# Altium PCB FPSController.PcbDoc
Units mm, origin at the board's own origin, x right, y up, seen from the top; angles counter-clockwise.
Board outline 26 x 13 mm, 4 copper layers (Top Layer, Ground Layer, Power Layer, Bottom Layer), stack 0.778 mm thick; 23 components, 19 nets, 107 pads, 72 vias.
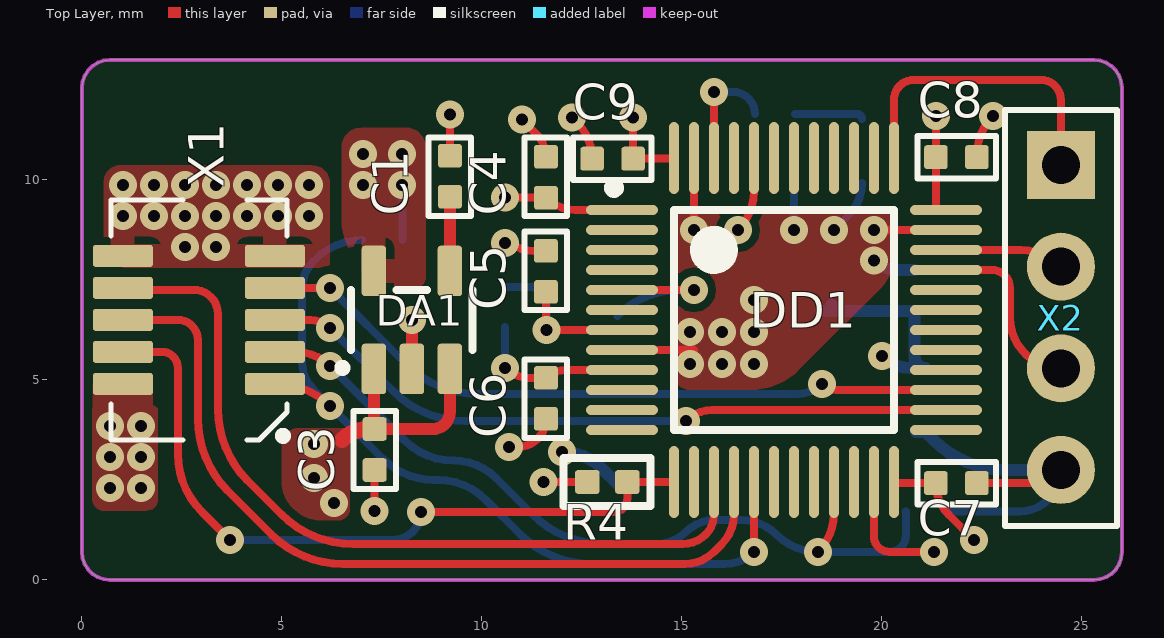
[diagram p0: Top Layer view]
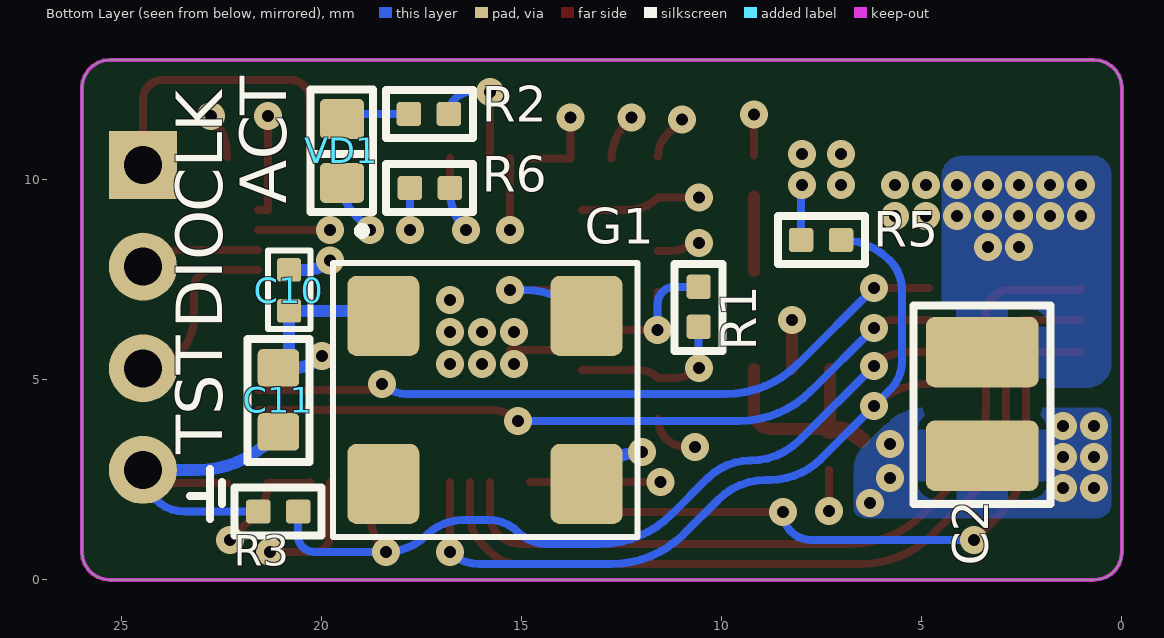
[diagram p1: Bottom Layer view, seen from below]
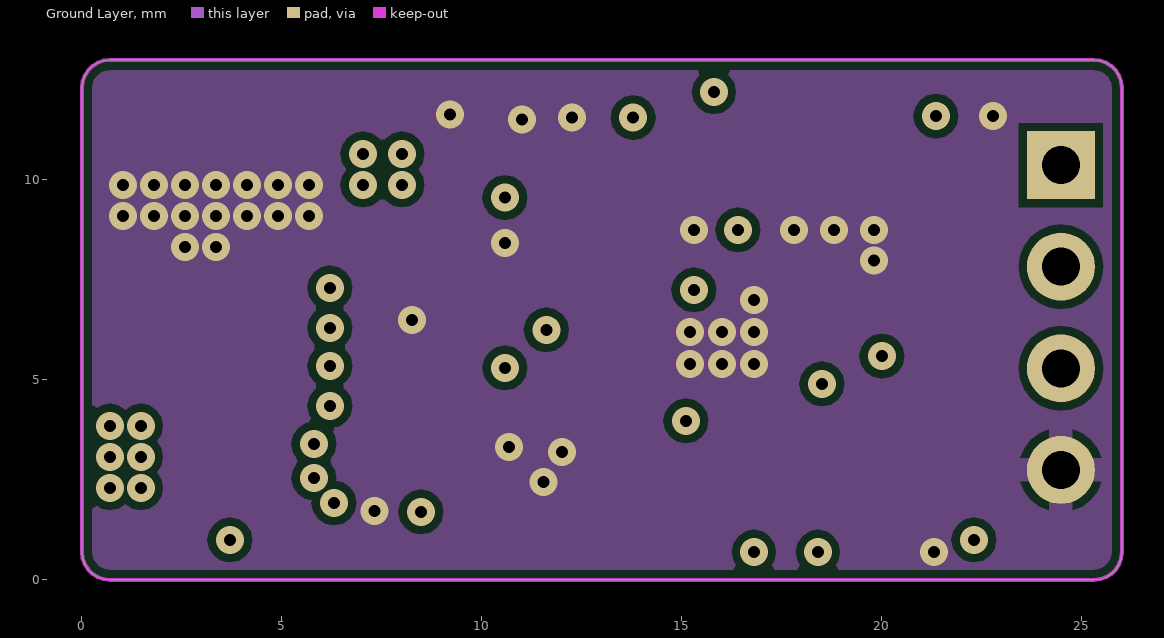
[diagram p2: Ground Layer]
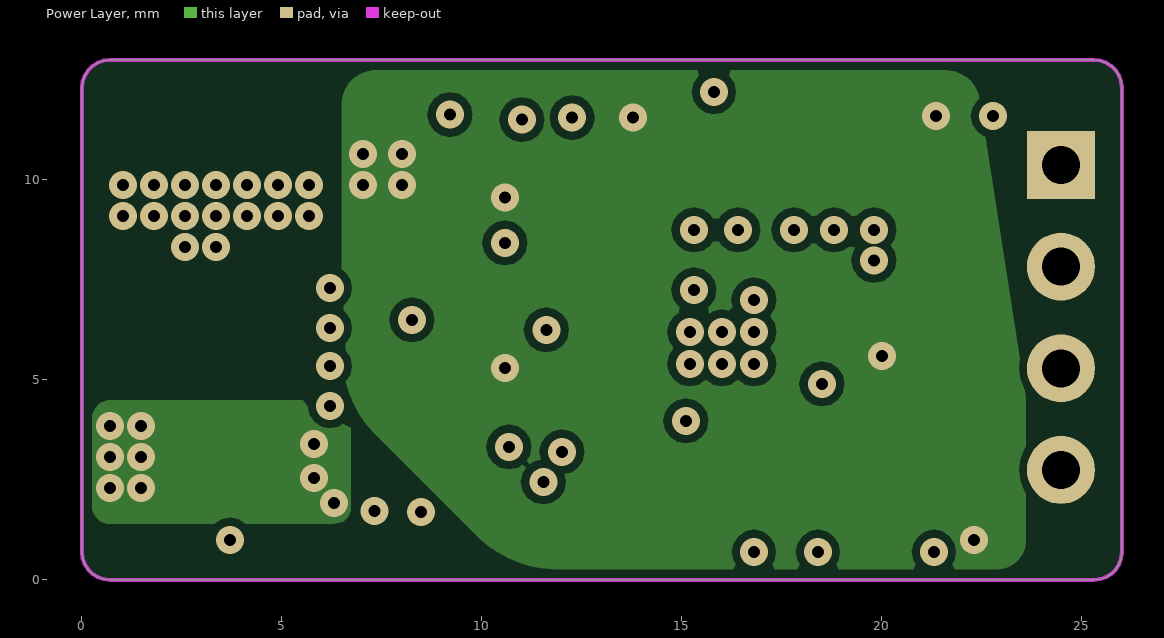
[diagram p3: Power Layer]
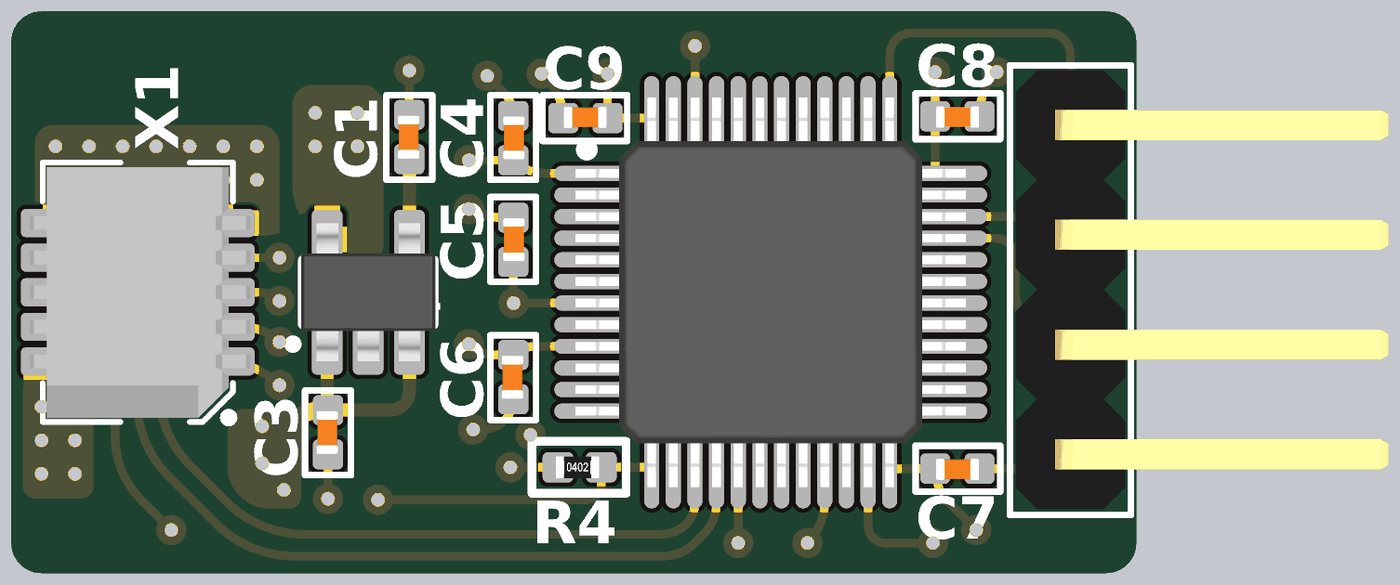
[diagram p4: 3D render of the assembled board from above, using the file's embedded part models]
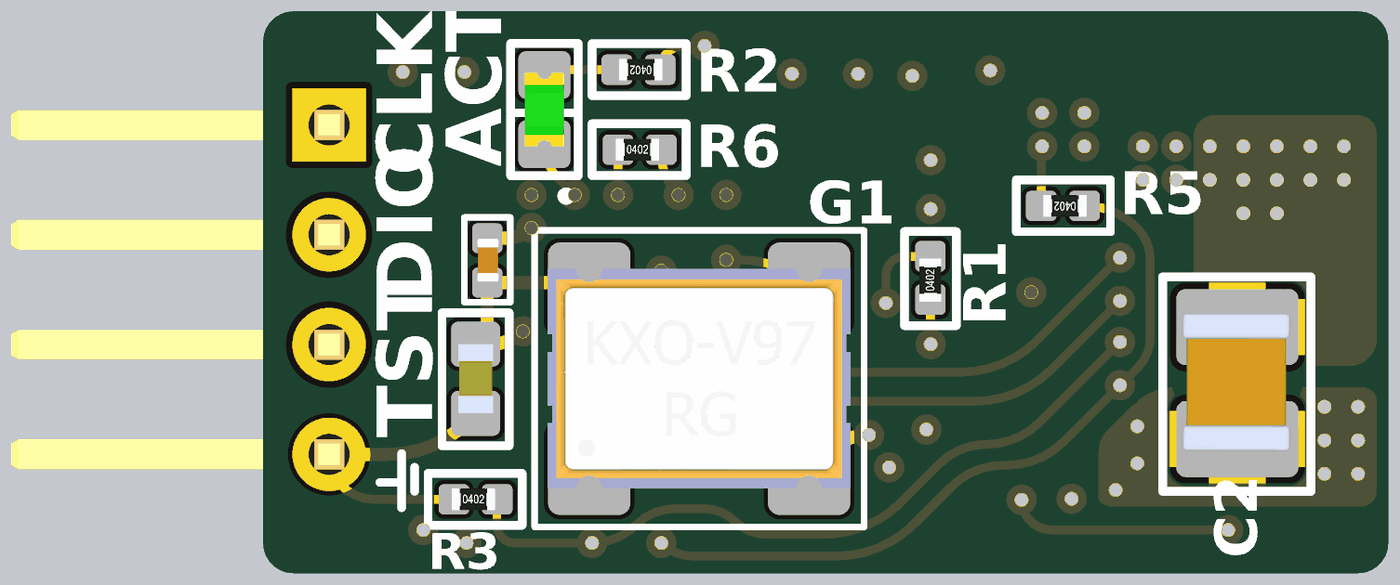
[diagram p5: 3D render of the assembled board from below, using the file's embedded part models]

## Layer stack, top to bottom
Top Solder: solder mask 0.0102, Solder Resist, Dk 3.5
Top Layer: signal copper 0.0356
Dielectric 1: core 0.254, FR-4, Dk 4.2
Ground Layer: signal copper 0.036
Dielectric 3: prepreg 0.127, Dk 4.2
Power Layer: signal copper 0.036
Dielectric 2: core 0.254, Dk 4.2
Bottom Layer: signal copper 0.0356
Bottom Solder: solder mask 0.0102, Solder Resist, Dk 3.5

## Board outline
0.7,13 0.544,12.982 0.396,12.931 0.264,12.847 0.153,12.736 0.069,12.604 0.018,12.456 0,12.3 0,0.7 0.018,0.544 0.069,0.396 0.153,0.263 0.264,0.153 0.396,0.069 0.544,0.017 0.7,0 25.3,0 25.456,0.017 25.604,0.069 25.736,0.153 25.847,0.263 25.931,0.396 25.982,0.544 26,0.7 26,12.3 25.982,12.456 25.931,12.604 25.847,12.736 25.736,12.847 25.604,12.931 25.456,12.982 25.3,13

## Design rules (kind name [scope] priority, off if disabled: settings)
Clearance Clearance_GND [InNet('5B') vs InNet('GND')] p1: gap=0.4 ignorepadtopadclearanceinfootprint=FALSE
Clearance Clearance_AGND_D [InNet('5BA_D') vs InNet('AGND_D')] p2: gap=0.4 ignorepadtopadclearanceinfootprint=FALSE
Clearance Clearance_AGND_M [InNet('5BA_M') vs InNet('AGND_M')] p3: gap=0.3 ignorepadtopadclearanceinfootprint=FALSE
Clearance Clearance_AGND_S [InNet('5BA_S') vs InNet('AGND_S')] p4: gap=0.3 ignorepadtopadclearanceinfootprint=FALSE
Clearance [All] p5: gap=0.2 ignorepadtopadclearanceinfootprint=FALSE
HoleSize [All] p1: absolutevalues=TRUE maxlimit=20 minlimit=0.025 maxpercent=80.000 minpercent=20.000
MinimumSolderMaskSliver [All] p1: minsoldermaskwidth=0.02
PasteMaskExpansion [All] p1: expansion=0.05
PolygonConnect PolygonConnect_via [All vs IsVia] p1: connectstyle=Direct reliefconductorwidth=0.254 reliefentries=4 polygonreliefangle="90 Angle" airgapwidth=0.254
PolygonConnect PolygonConnect_5B_1210 [HasFootprint('C1210')] p2: connectstyle=Relief reliefconductorwidth=1.3 reliefentries=4 polygonreliefangle="90 Angle" airgapwidth=0.2
PolygonConnect PolygonConnect_3.3B [HasFootprint('SlimStack-10pin-angl-plg') vs InNet('+3,3B')] p3: connectstyle=Relief reliefconductorwidth=1.5 reliefentries=4 polygonreliefangle="90 Angle" airgapwidth=0.254
PolygonConnect PolygonConnect_5B [HasFootprint('SlimStack-10pin-angl-plg') vs InNet('+5B')] p4: connectstyle=Relief reliefconductorwidth=1.5 reliefentries=4 polygonreliefangle="90 Angle" airgapwidth=0.254
PolygonConnect [All] p5: connectstyle=Relief reliefconductorwidth=0.6 reliefentries=4 polygonreliefangle="90 Angle" airgapwidth=0.2
RoutingVias [All] p1: holewidth=0.711 width=1.27 viastyle="Through Hole" minholewidth=0.711 minwidth=1.27 maxholewidth=0.711 maxwidth=1.27
SilkToSilkClearance [All] p1: silktosilkclearance=0
SilkToSolderMaskClearance [IsPad] p1: minsilkscreentomaskgap=0 clearancetoexposedcopper=TRUE
SolderMaskExpansion [All] p1: expansion=0.15 istentingtop=FALSE
Width [All] p1: maxlimit=3 minlimit=0.15 preferedwidth=0.2
25 further rules are at their usual default settings.

## Components (designator, comment, footprint, x,y, rotation, side; value= is the part's Value field where it differs from the comment)
C1 "0,1мк" C0402 9.18,10.08 r90 top
C2 "22мк" C1210 3.489,4.4 r270 bottom
C3 "0,1мк" C0402 7.3,3.249 r90 top
C4 "0,1мк" C0402 11.62,10.08 r270 top
C5 "0,1мк" C0402 11.62,7.725 r270 top
C6 "0,1мк" C0402 11.58,4.525 r90 top
C7 "0,1мк" C0402 21.875,2.4 r180 top
C8 "0,1мк" C0402 21.875,10.55 r180 top
C9 "0,1мк" C0402 13.255,10.55 r0 top
C10 "Capacitor" C0402 20.8,7.25 r270 bottom value=0,1мк
C11 "Capacitor" C0603 21.09,4.5 r90 bottom value=1мк
DA1 "TPS736DBV" SOT23-5 8.25,6.5 r90 top
DD1 "STM32F103C8T6" LQFP48 17.55,6.5 r0 top
G1 "KXO" QSMD7x5.2x1.8 15.925,4.5 r180 bottom
R1 "Resistor_0,062Вт" R0402 7.52,8.5 r0 bottom value=10к
R2 "Resistor_0,062Вт" R0402 17.325,11.65 r0 bottom value=270
R3 "Resistor_0,062Вт" R0402 21.09,1.709 r180 bottom value=10к
R4 "Resistor_0,062Вт" R0402 13.135,2.45 r0 top value=10к
R5 "Resistor_0,062Вт" R0402 10.581,6.829 r90 bottom value=10к
R6 "Resistor_0,062Вт" R0402 17.3,9.8 r180 bottom value=10к
VD1 "LED" L_0603_GREEN 19.5,10.725 r90 bottom
X1 "Header_10_plg" SlimStack-10pin-angl-plg 2.925,6.5 r270 top locked
X2 "Header_4_sct" PLS-4R 24.475,6.5 r0 top locked

## Footprints (in the part's own frame and the unit in brackets; to place one, negate y for a bottom-side part, rotate by r counter-clockwise, add the part's x,y. Pads: shape width x height; smd on the part's side, far side on the other; paste and mask are expansions set on the pad)
C0402 [mm]
  rrect25% 0.59x0.6 smd: 1(-0.5,-0.02) 2(0.525,-0.02)
  silkscreen extent -0.98,-0.55 0.98,0.51, body extent -0.49,-0.25 0.51,0.25, height 0.48
C0603 [mm]
  rrect25% 0.94x1.03 smd: 1(-0.8,0) 2(0.8,0)
  silkscreen extent -1.55,-0.77 1.53,0.77, body extent -0.8,-0.4 0.8,0.4, height 0.9
C1210 [mm]
  rrect25% 1.76x2.82 smd paste-5: 1(-1.295,0) 2(1.295,0)
  silkscreen extent -2.46,-1.73 2.5,1.7, body extent -1.62,-1.27 1.58,1.23, height 1.65
L_0603_GREEN [mm]
  rrect25% 1x1.1 smd: 1(-0.8,0) 2(0.8,0)
  silkscreen extent -2.1,-0.78 1.53,0.78, body extent -0.85,-0.45 0.85,0.45, height 0.9
LQFP48 [mm] "Thin QFP, 48-Leads, Body 7x7mm, Pitch 0.5mm, IPC Medium Density"
  oval 1.8x0.25 smd: 1(-4.05,2.75) 2(-4.05,2.25) 3(-4.05,1.75) 4(-4.05,1.25) 5(-4.05,0.75) 6(-4.05,0.25) 7(-4.05,-0.25) 8(-4.05,-0.75) 9(-4.05,-1.25) 10(-4.05,-1.75) 11(-4.05,-2.25) 12(-4.05,-2.75) 25(4.05,-2.75) 26(4.05,-2.25) 27(4.05,-1.75) 28(4.05,-1.25) 29(4.05,-0.75) 30(4.05,-0.25) 31(4.05,0.25) 32(4.05,0.75) 33(4.05,1.25) 34(4.05,1.75) 35(4.05,2.25) 36(4.05,2.75)
  oval 0.25x1.8 smd: 13(-2.75,-4.05) 14(-2.25,-4.05) 15(-1.75,-4.05) 16(-1.25,-4.05) 17(-0.75,-4.05) 18(-0.25,-4.05) 19(0.25,-4.05) 20(0.75,-4.05) 21(1.25,-4.05) 22(1.75,-4.05) 23(2.25,-4.05) 24(2.75,-4.05) 37(2.75,4.05) 38(2.25,4.05) 39(1.75,4.05) 40(1.25,4.05) 41(0.75,4.05) 42(0.25,4.05) 43(-0.25,4.05) 44(-0.75,4.05) 45(-1.25,4.05) 46(-1.75,4.05) 47(-2.25,4.05) 48(-2.75,4.05)
  silkscreen extent -4.37,-2.75 2.75,3.42, body extent -4.51,-4.51 4.51,4.51, height 1.46
PLS-4R [mm]
  rect 1.7x1.7 hole 0.95: 1(0,3.87)
  round 1.7 hole 0.95: 2(0,1.33) 3(0,-1.21)
  round 1.7 hole 0.95 mask+0.102: 4(0,-3.75)
  silkscreen extent -1.4,-5.15 1.4,5.25, body extent -1.27,-5.02 7.35,5.14, height 5.45
QSMD7x5.2x1.8 [mm]
  rrect25% 1.8x2 smd: 1(-2.54,-2.1) 2(2.54,-2.1) 3(2.54,2.1) 4(-2.54,2.1)
  silkscreen extent -3.8,-3.43 3.81,3.43, body extent -3.5,-2.54 3.5,2.54, height 1.3
R0402 [mm]
  rrect25% 0.61x0.6 smd: 1(-0.5,0) 2(0.5,0)
  silkscreen extent -1.1,-0.6 1.08,0.6, body extent -0.55,-0.25 0.45,0.25, height 0.35
SlimStack-10pin-angl-plg [mm]
  rrect25% 0.55x1.5 smd: 1(1.6,1.9) 2(1.6,-1.9) 3(0.8,1.9) 4(0.8,-1.9) 5(0,1.9) 6(0,-1.9) 7(-0.8,1.9) 8(-0.8,-1.9) 9(-1.6,1.9) 10(-1.6,-1.9)
  silkscreen extent -3,-2.2 3,2.2, body extent -2.9,-2.5 2.9,2.6, height 4.67
SOT23-5 [mm]
  rrect25% 1.26x0.61 smd: 1(-1.225,0.95) 2(-1.225,0) 3(-1.225,-0.95) 4(1.225,-0.95) 5(1.225,0.95)
  silkscreen extent -1.3,-1.52 0.75,1.84, body extent -1.6,-1.56 1.6,1.55, height 1.45

## Part data
C1 C3 C4 C5 C6 C7 C8 C9 C10: library part cap277, "Конденсатор", Manufacture=Murata, Part Name=Ceramic, Part Number=GRM155R71H104KE14D, Voltage=50В, id=cap277, tga=0,10%, TKE=X7R
C2: library part cap294, "Конденсатор", Manufacture=TDK, Part Name=MLCC, Part Number=C3225X7R1C226M, Voltage=16B, id=cap294, tga=0,20%, TKE=X7R
C11: library part cap133, "Конденсатор", Manufacture=Murata, Part Name=Ceramic, Part Number=GRM188R71C105KA12D**, Voltage=16B, id=cap133, TKE=X7R
DA1: library part pwr113, "400-mA Low-Dropout Regulator with Reverse Current  Protection", Current=400mA, Dropout Voltage=75mB, Input Voltage=1,7-5,5В, Manufacturer="Texas Instruments", Output Voltage=3,3B, Part Name="Low-Dropout Regulator with Reverse Current Protection", Part Number=TPS73633DBV, id=pwr113, Type=Linear
DD1: library part microcont0, "Medium-density performance line ARM®-based 32-bit MCU with 64  or 128 KB Flash, USB, CAN, 7 timers, 2 ADCs, 9 com. interfaces", Frequency=72MHz, Part Name=Microcontroller, Power Supply="2.0-3.6 V", ADC=10x12b, Flash=64kb, id=microcont0, Interface="can, i2c, irda, lin, spi, uart, usb", Part Number=STM32F103C8T6, Pin in=37
G1: library part crystal10, "Кварц. генер. 32.768 МГц (HCMOS/TTL)", Frequence=12MHz, Manufacture=GEYER, Part Number=KXO-V97, id=crystal10
R1 R3 R4 R5 R6: library part res294, "Резистор", Manufacture=Yageo, Part Name=Resistor, Part Number=RC0402FR-0710KL, Power=0,062Вт, id=res294
  R1 R3 R4 R6: Accuracy=0,01
  R5: Accuracy=0.01
R2: library part res256, "Резистор", Manufacture=Yageo, Part Name=Resistor, Part Number=RC0402FR-07270RL, Power=0,062Вт, Accuracy=0,01, id=res256
VD1: library part diode43, "Светодиод", Manufacture=OASISTEK, Part Name="LED green 0603", Part Number=TO-1608BC-PG, id=diode43
X1: library part connect227, "Разъем - 10 конт. вилка", Manufacture=Molex, Part Name="SlimStack Board-to-Board plug", Part Number=533091070, Contact_1=SSI_RE, Contact_2=+5В, Contact_3=SSI_DE, Contact_4=CONVST_MCU, Contact_5=SSI_CLOCK, Contact_6=MISO_MCU, Contact_7=SSI_DATA, Contact_8=SCLK_MCU, Contact_9=GND, Contact_10=GND, Etch=0.8mm, id=connect227
X2: library part connect127, "Разъем - 4 конт. розетка", Manufacture="Ningbo connfly electronic", Part Name=PLS-4R, Part Number=DS1022-1*4RDF11-B, Contact_1=SWCLK, Contact_2=SWDIO, Contact_3=TEST, Contact_4=GND, Etch=2.54mm, id=connect127

## Via types
v1: diameter 0.7, hole 0.3, Top Layer to Bottom Layer, tented both sides, 72 vias

## Nets (pads, with @x,y where several pads share a name; then routed paths per layer and width w, separated by ;. In a path a pad name is that pad's centre, name@x,y a point inside that pad or via, vN(x,y) a via of type N, cw(c..) or ccw(c..) an arc to the next point about the centre after c; other vN are vias at no path point)
+3,3B: C4.2 C6.2 C7.2 C8.2 C9.2 C10.2 C11.2 DA1.5 DD1.1 DD1.9 DD1.24 DD1.36 DD1.48 G1.4 R1.2 R5.1 | length 21.3
  Top Layer w0.2: v1(10.575,5.3) ccw(c11.179,5.904) 11.179,5.05 C6.2 cw(c12.083,4.567) 12.083,5.25 DD1.9 ; v1(10.575,9.555) C4.2 ccw(c12.336,10.291) 12.336,9.25 DD1.1 ; v1(13.78,11.555) C9.2 14.8,10.53 DD1.48 ; DD1.24 20.33,2.42 C7.2 ccw(c22.485,2.42) 21.682,1.618 v1(22.3,1) ; v1(21.35,11.595) C8.2 21.35,9.25 DD1.36
  Bottom Layer w0.2: v1(8,9.875) cw(c7.953,9.828) 8.02,9.828 R1.2 ; v1(10.575,5.3) 10.581,5.3 R5.1
  Bottom Layer w0.3: G1.4@18.465,6.725 G1.4@18.915,6.725 ; G1.4@18.74,6.9 ccw(c18.915,6.9) G1.4@18.915,6.725 ; v1(20,5.594) ccw(c20.71,6.304) 20.71,5.3 C11.2 cw(c21.09,5.57) 20.82,5.57 C10.2 G1.4@18.915,6.725
  other v1: 7.025,9.875 7.025,10.65 8,10.65
+5B: C2.2 C3.2 DA1.1 DA1.3 X1.2 | length 5.6
  Top Layer w0.3: C3.2@7.3,3.794 DA1.1 ; C3.2 8.774,3.774 ccw(c8.774,4.2) 9.2,4.2 DA1.3
  Top Layer w0.4: 6.5,3.5 cw(c7.16,2.84) 7.16,3.774 7.28,3.774 C3.2
  Top Layer w0.5: C3.2@7.28,3.774 ccw(c7.28,3.794) C3.2@7.3,3.794
  other v1: 6.3,1.926 0.7,2.3 1.475,2.3 5.8,2.543 0.7,3.075 1.475,3.075 5.8,3.4 0.7,3.85 1.475,3.85
CONVST_MCU: DD1.13 R4.2 X1.4 | length 18.5
  Top Layer w0.2: X1.4 2,5.7 cw(c2,5.3) 2.4,5.3 2.4,3.149 ccw(c4.449,3.149) 3,1.7 v1(3.7,1) ; v1(8.475,1.7) 13.3,1.7 ccw(c13.3,2.035) 13.635,2.035 R4.2 DD1.13
  Bottom Layer w0.2: v1(3.7,1) 7.775,1 ccw(c7.775,1.7) v1(8.475,1.7)
GND: C1.2 C2.1 C3.1 C4.1 C5.1 C6.1 C7.1 C8.1 C9.1 C10.1 C11.1 DA1.2 DD1.8 DD1.23 DD1.35 DD1.47 G1.2 R3.1 R4.1 R6.1 VD1.1 X1.9 X1.10 X2.4 | length 33.6
  Top Layer w0.2: v1(7.32,1.724) C3.1 ; C1.2 v1(9.2,11.63) ; v1@10.575,8.525 ccw(c11.299,9.249) 11.299,8.225 C5.1 ; v1(10.675,3.325) 10.9,3.325 ccw(c10.9,4.025) C6.1 ; v1(11,11.505) 11.37,11.135 cw(c10.815,10.58) C4.1 ; v1(11.535,2.45) R4.1 ; v1(12.255,11.555) 12.384,11.426 cw(c11.488,10.53) C9.1 ; DD1.8 15.3,5.75 ; v1(15.3,8.75) DD1.47 ; DD1.23 19.8,1.091 ccw(c20.191,1.091) 20.191,0.7 v1(21.3,0.7) ; v1(19.8,8.75) DD1.35 ; C7.1 24.145,2.42 ccw(c24.145,2.75) X2.4 ; C8.1 22.375,10.629 cw(c23.741,10.629) v1(22.775,11.595)
  Top Layer w0.3: DA1.2 v1(8.25,6.5)
  Bottom Layer w0.2: v1(17.8,8.75) R6.1 ; v1(18.8,8.75) 19.164,9.114 ccw(c18.353,9.925) VD1.1 ; R3.1 23.434,1.709 ccw(c23.434,2.75) X2.4
  Bottom Layer w0.3: v1(12,3.2) cw(c12,1.788) 12.999,2.786 G1.2 ; v1(19.8,7.988) ccw(c20.374,8.562) 20.374,7.75 C10.1 ; C11.1@20.85,3.7 C11.1 21.296,3.494 ccw(c23.092,5.29) 23.092,2.75 X2.4
  other v1: 15.2,5.4 16,5.4 16.8,5.4 15.2,6.2 16,6.2 16.8,6.2 16.8,7 2.575,8.325 3.35,8.325 10.575,8.425 1.025,9.1 1.8,9.1 2.575,9.1 3.35,9.1 4.125,9.1 4.9,9.1 5.675,9.1 1.025,9.875 1.8,9.875 2.575,9.875 3.35,9.875 4.125,9.875 4.9,9.875 5.675,9.875
MCU_LED: DD1.46 R2.1 | length 3
  Top Layer w0.2: DD1.46 v1(15.8,12.2)
  Bottom Layer w0.2: v1(15.8,12.2) 16.275,12.2 cw(c16.275,11.65) R2.1
MCU_SSI_CLOCK: DD1.26 X1.5 | length 17.8
  Top Layer w0.2: X1.5 5.717,6.5 cw(c5.717,5.817) v1(6.2,6.3) ; v1(15.1,3.975) cw(c15.764,3.311) 15.764,4.25 DD1.26
  Bottom Layer w0.2: v1(6.2,6.3) 7.781,4.719 ccw(c9.577,6.515) 9.577,3.975 v1(15.1,3.975)
MCU_SSI_DATA: DD1.27 X1.7 | length 17.9
  Top Layer w0.2: X1.7 v1(6.2,7.3) ; v1(18.5,4.9) ccw(c18.862,5.262) 18.862,4.75 DD1.27
  Bottom Layer w0.2: v1(6.2,7.3) 8.106,5.394 ccw(c9.902,7.19) 9.902,4.65 17.896,4.65 ccw(c17.896,5.504) v1(18.5,4.9)
MCU_SSI_DE: DD1.21 R3.2 X1.3 | length 20.5
  Top Layer w0.2: X1.3 5.355,5.7 cw(c5.355,4.505) v1(6.2,5.35) ; v1(18.4,0.7) ccw(c17.434,1.666) 18.8,1.666 DD1.21
  Bottom Layer w0.2: v1(6.2,5.35) 8.053,3.497 ccw(c9.3,4.745) 9.3,2.981 cw(c9.3,1.485) 10.357,2.543 11.256,1.644 ccw(c13.052,3.44) 13.052,0.9 14.376,0.9 ccw(c14.376,1.924) 15.1,1.2 cw(c15.812,0.488) 15.812,1.495 16.481,1.495 cw(c16.481,0.229) 17.376,1.124 ccw(c18.4,2.149) v1(18.4,0.7) 20.191,0.7 ccw(c20.191,1.109) 20.6,1.109 20.6,1.709 R3.2
MCU_SSI_RE: DD1.17 R1.1 X1.1 | length 20.7
  Top Layer w0.2: X1.1 4.872,4.9 cw(c4.872,3.022) v1(6.2,4.35) ; v1(16.8,0.7) DD1.17
  Bottom Layer w0.2: R1.1 ccw(c7.02,6.801) 5.818,8.002 5.803,7.988 ccw(c6.536,7.255) 5.5,7.255 5.5,5.45 ccw(c6.466,5.45) 5.783,4.767 v1(6.2,4.35) 7.52,3.03 ccw(c8.8,4.311) 8.8,2.5 8.893,2.5 cw(c8.893,0.793) 10.1,2 10.96,1.14 ccw(c12.756,2.936) 12.756,0.396 16.066,0.396 ccw(c16.066,1.434) v1(16.8,0.7)
MCU_SWCLK: DD1.37 X2.1 | length 7.8
  Top Layer w0.2: DD1.37 20.3,12 cw(c20.8,12) 20.8,12.5 23.975,12.5 cw(c23.975,12) 24.475,12 X2.1
MCU_SWDIO: DD1.34 X2.2 | length 3
  Top Layer w0.2: DD1.34 23.461,8.25 cw(c23.461,6.816) X2.2
MCU_TEST: DD1.33 X2.3 | length 4.6
  Top Layer w0.2: DD1.33 22.75,7.75 cw(c22.75,7.3) 23.2,7.3 23.2,6.565 ccw(c24.475,6.565) X2.3
NetC1_1: C1.1 DA1.4 | length 1.9
  Top Layer w0.3: DA1.4 C1.1
NetC5_2: C5.2 DD1.7 R5.2 | length 4.8
  Top Layer w0.2: C5.2 11.605,7.195 11.605,6.255 v1(11.609,6.25) DD1.7
  Bottom Layer w0.2: R5.2 11.18,7.329 cw(c11.18,6.9) 11.609,6.9 v1(11.609,6.25)
NetDD1_5: DD1.5 G1.3 | length 3.9
  Top Layer w0.2: DD1.5 v1(15.3,7.25)
  Bottom Layer w0.2: G1.3 cw(c14.954,5.031) 14.954,7.25 v1(15.3,7.25)
NetDD1_44: DD1.44 R6.2 | length 3.1
  Top Layer w0.2: v1(16.4,8.75) ccw(c15.434,9.716) 16.8,9.716 DD1.44
  Bottom Layer w0.2: v1(16.4,8.75) ccw(c15.434,9.716) 16.8,9.716 R6.2
NetR2_2: R2.2 VD1.2 | length 1.7
  Bottom Layer w0.2: R2.2 19.375,11.65 cw(c19.375,11.525) VD1.2
SPI1_MISO_MCU: DD1.16 X1.6 | length 20.9
  Top Layer w0.2: X1.6 2.4,6.5 cw(c2.4,6) 2.9,6 2.9,4.027 ccw(c5.44,4.027) 3.644,2.231 4.735,1.14 ccw(c6.531,2.936) 6.531,0.396 15.066,0.396 ccw(c15.066,1.434) 15.8,0.7 16,0.9 ccw(c15.276,1.624) 16.3,1.624 DD1.16
SPI1_SCLK_MCU: DD1.15 X1.8 | length 20.5
  Top Layer w0.2: X1.8 ccw(c1.075,7.3) 1.075,7.25 2.8,7.25 cw(c2.8,6.65) 3.4,6.65 3.4,4.277 ccw(c5.94,4.277) 4.144,2.481 4.981,1.644 ccw(c6.777,3.44) 6.777,0.9 15.02,0.9 ccw(c15.02,1.72) 15.6,1.14 ccw(c15.117,1.623) 15.8,1.623 DD1.15
pads on no net: DD1.2 DD1.3 DD1.4 DD1.6 DD1.10 DD1.11 DD1.12 DD1.14 DD1.18 DD1.19 DD1.20 DD1.22 DD1.25 DD1.28 DD1.29 DD1.30 DD1.31 DD1.32 DD1.38 DD1.39 DD1.40 DD1.41 DD1.42 DD1.43 DD1.45 G1.1

## Polygon pours and split planes (outlines as drawn)
+5B on Top Layer "Top Signal Layer-No Net" (solid, remove dead copper, pour order 30): 5,3.4 5,2.464 ccw(c5.969,2.464) 5.969,1.495 6.426,1.495 ccw(c6.426,1.769) 6.7,1.769 6.7,3.794 5.394,3.794 ccw(c5.393,3.4)
GND on Top Layer "Top Layer-GND" (solid, pour order 0): 0.544,7.8 6.2,7.8 6.2,9.9 ccw(c5.73,9.9) 5.73,10.37 0.97,10.37 ccw(c0.97,9.944) 0.544,9.944
+3,3B on Top Layer "Top Layer-+3,3B" (solid, pour order 8): 6.5,8.983 6.5,10.823 cw(c6.977,10.823) 6.977,11.3 8.1,11.3 cw(c8.1,10.8) 8.6,10.8 8.6,7.6 cw(c8.25,7.6) 8.25,7.25 7.638,7.25 6.921,7.967 cw(c7.937,8.983)
GND on Top Layer "Top Layer-GND 3" (solid, pour order 16): 14.8,5.15 14.8,8.9 cw(c15.1,8.9) 15.1,9.2 20,9.2 cw(c20,8.9) 20.3,8.9 20.3,8.083 cw(c19.199,8.083) 19.978,7.304 17.937,5.264 cw(c16.696,6.504) 16.696,4.75 15.2,4.75 cw(c15.2,5.15)
+5B on Top Layer "Top Layer-+3,3B 1" (solid, pour order 14): 0.264,5.2 1.9,5.2 1.9,2.015 cw(c1.61,2.015) 1.61,1.725 0.578,1.722 cw(c0.577,2.036) 0.264,2.036
+3,3B on Power Layer "Power Layer-+3,3B" (solid, pour order 10): 11.912,0.263 22.863,0.263 ccw(c22.863,1) 23.6,1 23.6,4.545 22.427,12.034 ccw(c21.607,11.906) 21.607,12.736 7.336,12.736 ccw(c7.336,11.901) 6.5,11.9 6.5,7.8 6.5,5.686 ccw(c9.425,5.686) 7.357,3.618 9.862,1.113 ccw(c11.912,3.163)
+5B on Power Layer "Top Signal Layer-No Net" (solid, remove dead copper, pour order 24): 0.718,4.493 6.721,4.493 6.721,1.816 cw(c6.305,1.816) 6.305,1.4 0.7,1.4 cw(c0.7,1.836) 0.264,1.836 0.264,4.039 cw(c0.718,4.039)
+5B on Bottom Layer "Top Signal Layer-No Net" (solid, remove dead copper, pour order 26): 0.6,4.3 4.917,4.3 cw(c4.917,2.893) 5.912,3.888 6.48,3.32 cw(c5.949,2.789) 6.7,2.789 6.7,1.8 cw(c6.444,1.8) 6.444,1.544 0.645,1.544 cw(c0.645,1.926) 0.264,1.926 0.264,3.964 cw(c0.6,3.964)
GND on Bottom Layer "Bottom Layer-GND" (solid, pour order 22): 0.9,4.8 4.502,4.8 4.502,10.098 ccw(c4,10.098) 4,10.6 0.73,10.6 ccw(c0.73,10.134) 0.264,10.134 0.264,5.436 ccw(c0.9,5.436)
GND on Ground Layer "Ground Layer-GND" (solid, pour order 6): 0,12.3 0,0.7 ccw(c0.7,0.7) 0.7,0 25.3,0 ccw(c25.3,0.7) 26,0.7 26,12.3 ccw(c25.3,12.3) 25.3,13 0.7,13 ccw(c0.7,12.3)

## Keep-outs
Keep-Out Layer:
  the board outline again, w0.1

## Silkscreen, mask and mechanical layers (free items; w line width, h text height)
Bottom Overlay:
  lines w0.2: 22.5,1.897 22.5,2.45 ; 22.8,1.517 22.8,2.768 ; 22.8,2.1 23.3,2.1
  text "ACT" at 20.5,9.4 h2 r270
  text "CLK" at 22.1,9.198 h2 r270
  text "DIO" at 22.1,6.282 h2 r270
  text "TST" at 22.1,3.142 h2 r270